# Altium PCB sismin double layer.PcbDoc
Units mil, origin at the board's own origin, x right, y up, seen from the top; angles counter-clockwise.
Board outline 6000 x 4000 mil, 2 copper layers (Top Layer, Bottom Layer); 42 components, 0 nets, 314 pads, 39 vias.
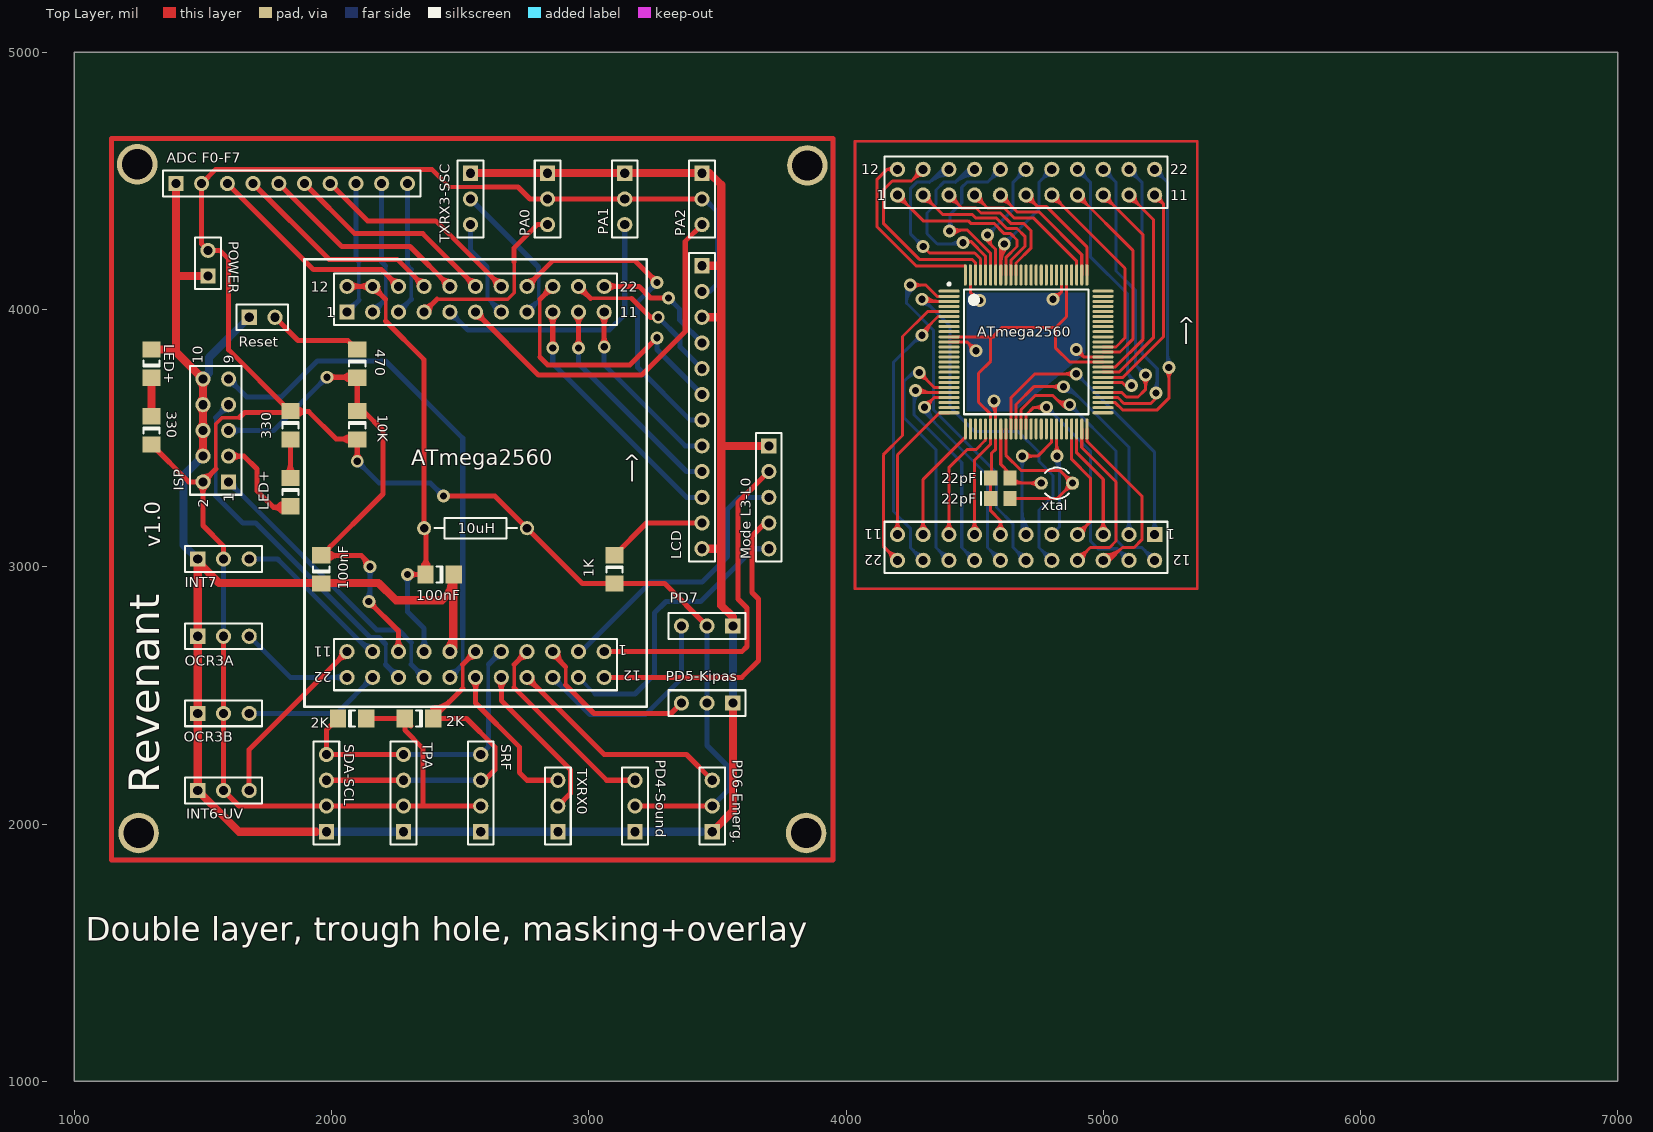
[diagram p0: Top Layer view]
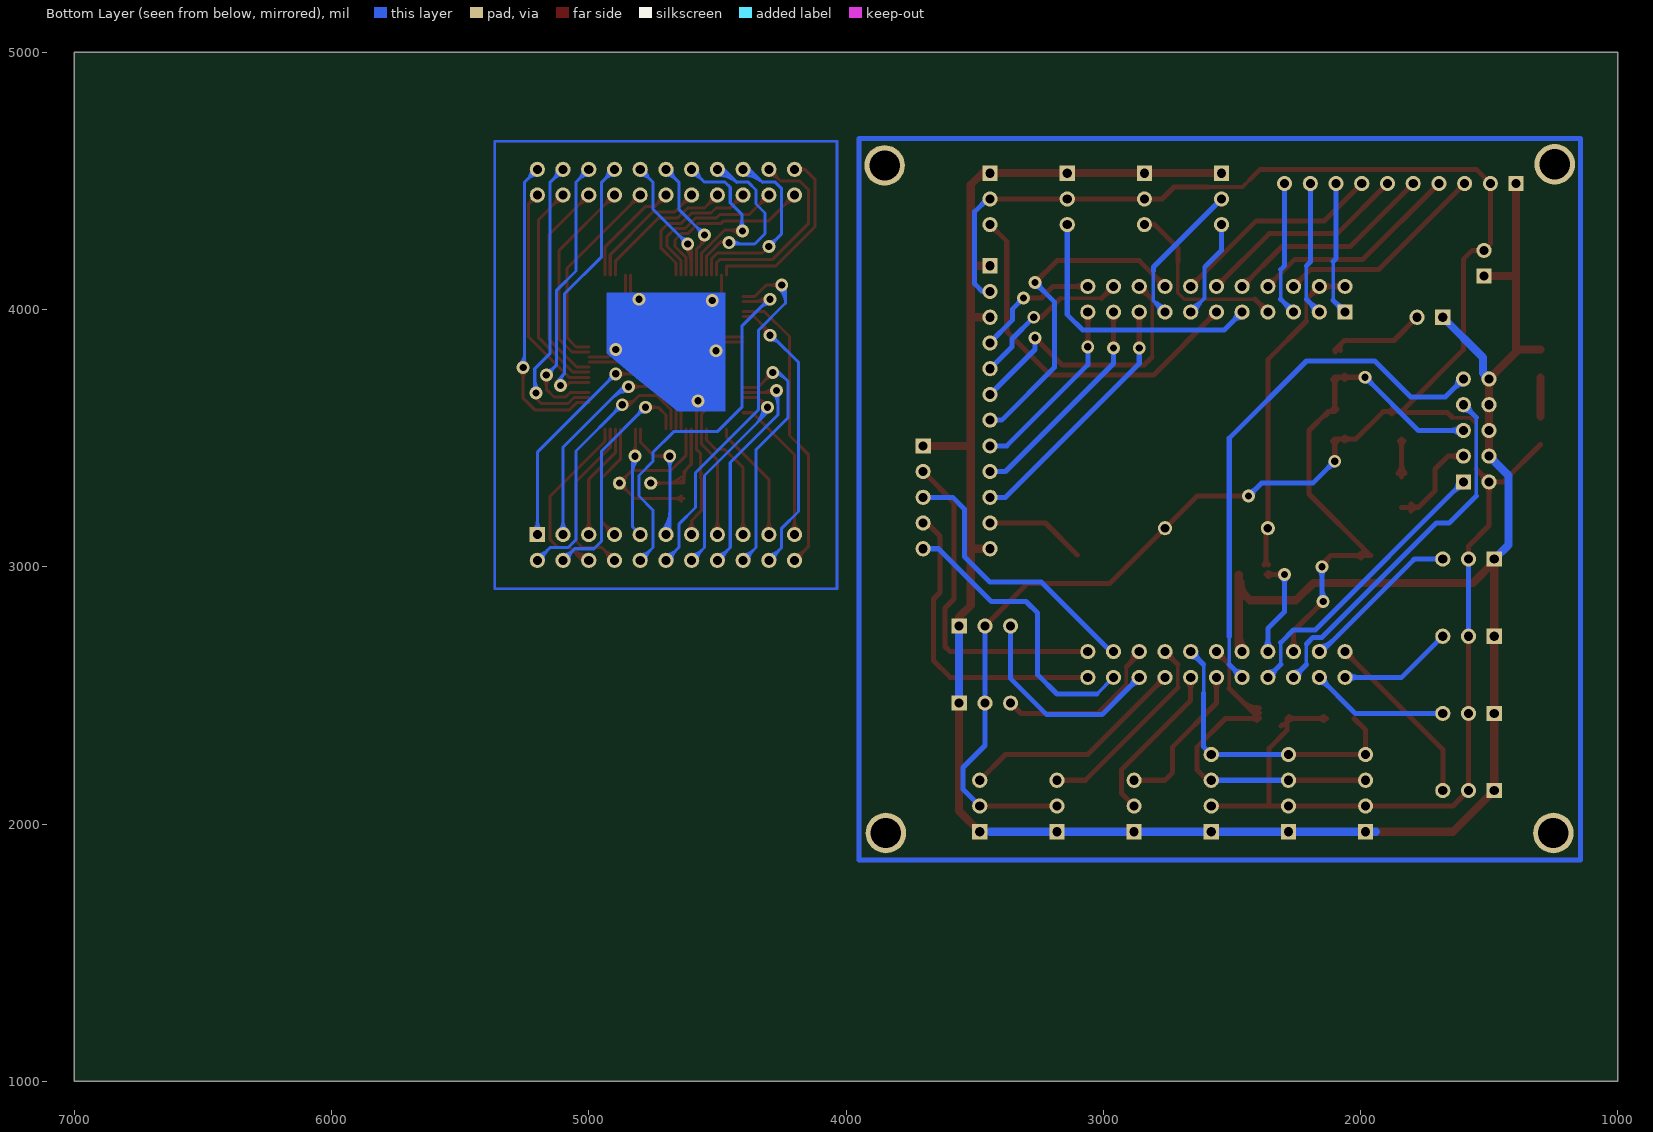
[diagram p1: Bottom Layer view, seen from below]

## Layer stack, top to bottom
Top Layer: signal copper 1.4
Dielectric: dielectric 12.6, FR-4, Dk 4.8
Bottom Layer: signal copper 1.4

## Board outline
1000,1000 7000,1000 7000,5000 1000,5000

## Design rules (kind name [scope] priority, off if disabled: settings)
Clearance [All] p1: gap=10
PolygonConnect [All] p1: connectstyle=Relief reliefconductorwidth=10 reliefentries=4 polygonreliefangle="90 Angle"
RoutingVias [All] p1: holewidth=28 width=50 viastyle="Through Hole" minholewidth=28 minwidth=50 maxholewidth=28 maxwidth=50
SilkscreenOverComponentPads [All] p1: minsilkscreentomaskgap=10
SolderMaskExpansion [All] p1: expansion=4
Width [All] p1: maxlimit=10 minlimit=10 preferedwidth=10
27 further rules are at their usual default settings.

## Components (designator, comment, footprint, x,y, rotation, side; value= is the part's Value field where it differs from the comment)
1K "Res2" 1206 3100,2990 r270 top (schematic designator R.LCD)
2K "Res2" 1206 2080,2410 r0 top (schematic designator R.SDA)
2K "Res2" 1206 2340,2410 r180 top (schematic designator R.SCL)
10K "Res2" 1206 2100,3550 r270 top (schematic designator R.res1)
10uH "10uH" AXIAL-0.4 2560,3150 r0 top (schematic designator L)
22pF "Cap" 0805 4600,3265 r0 top (schematic designator 22pF1)
22pF "" 0805 4600,3345 r0 top
100nF "Cap" 1206 2420,2970 r180 top (schematic designator C)
100nF "Cap" 1206 1960,2990 r90 top (schematic designator C.res)
330 "Res2" 1206 1300,3530 r270 top (schematic designator R.Pow)
330 "Res2" 1206 1840,3550 r270 top (schematic designator R.ISP)
470 "Res2" 1206 2100,3790 r270 top (schematic designator R.res2)
"ADC F0-F7" "Header 10" HDR1X10 1395,4490 r0 top (schematic designator ADC)
ATmega2560 "ATmega2560-16AU" 100A_M 4700,3835 r0 top (schematic designator U1)
Header.A "Header 11X2A" HDR2X11_CEN#1 5200,3125 r180 top
Header.A "Header 11X2A" HDR2X11_CEN#2 3060,2670 r180 top
Header.B "Header 11X2A" HDR2X11_CEN#2 4200,4445 r0 top
Header.B "Header 11X2A" HDR2X11_CEN#1 2060,3990 r0 top
INT6-UV "Header 3" HDR1X3 1480,2130 r0 top (schematic designator UVTron)
INT7 "Header 3" HDR1X3 1480,3030 r0 top
ISP "ISP" HDR2X5 1600,3330 r90 top (schematic designator ISP_S1)
LCD "Header 12" HDR1X12 3440,4170 r270 top
LED+ "LED1" 1206 1300,3790 r90 top (schematic designator Led.Pow)
LED+ "LED1" 1206 1840,3290 r270 top (schematic designator Led.ISP)
"Mode L3-L0" "Header 4" HDR1X5 3700,3470 r270 top (schematic designator DIP.SW)
OCR3A "Header 3" HDR1X3 1480,2730 r0 top
OCR3B "Header 3" HDR1X3 1480,2430 r0 top
PA0 "Header 3" HDR1X3 2840,4530 r270 top
PA1 "Header 3" HDR1X3 3140,4530 r270 top
PA2 "Header 3" HDR1X3 3440,4530 r270 top
PD4-Sound "Header 3" HDR1X3 3180,1970 r90 top (schematic designator Sound)
PD5-Kipas "Header 3" HDR1X3 3560,2470 r180 top (schematic designator Kipas)
PD6-Emerg. "Header 3" HDR1X3 3480,1970 r90 top (schematic designator Emergency)
PD7 "Header 3" HDR1X3 3560,2770 r180 top
POWER "Header 2" HDR1X2 1520,4130 r90 top (schematic designator Switch)
Reset "SW-PB" HDR1X2 1680,3970 r0 top (schematic designator S1)
SDA-SCL "Header 4" HDR1X4 2280,1970 r90 top (schematic designator I2C)
SRF "Header 4" HDR1X4 2580,1970 r90 top
TPA "Header 4" HDR1X4 1980,1970 r90 top
TXRX0 "Header 3" HDR1X3 2880,1970 r90 top (schematic designator USART0)
TXRX3-SSC "Header 3" HDR1X3 2540,4530 r270 top (schematic designator SSC)
xtal "XTAL" BCY-W2/D3.1 4820,3325 r90 top (schematic designator kristal)

## Footprints (in the part's own frame and the unit in brackets; to place one, negate y for a bottom-side part, rotate by r counter-clockwise, add the part's x,y. Pads: shape width x height; smd on the part's side, far side on the other; paste and mask are expansions set on the pad)
100A_M [mm] "Thin QFP, 100-Leads, Body 14x14mm, Pitch 0.5mm, IPC Low Density"
  oval 2.1x0.3 smd: 1(-7.6,6) 2(-7.6,5.5) 3(-7.6,5) 4(-7.6,4.5) 5(-7.6,4) 6(-7.6,3.5) 7(-7.6,3) 8(-7.6,2.5) 9(-7.6,2) 10(-7.6,1.5) 11(-7.6,1) 12(-7.6,0.5) 13(-7.6,0) 14(-7.6,-0.5) 15(-7.6,-1) 16(-7.6,-1.5) 17(-7.6,-2) 18(-7.6,-2.5) 19(-7.6,-3) 20(-7.6,-3.5) 21(-7.6,-4) 22(-7.6,-4.5) 23(-7.6,-5) 24(-7.6,-5.5) 25(-7.6,-6) 51(7.6,-6) 52(7.6,-5.5) 53(7.6,-5) 54(7.6,-4.5) 55(7.6,-4) 56(7.6,-3.5) 57(7.6,-3) 58(7.6,-2.5) 59(7.6,-2) 60(7.6,-1.5) 61(7.6,-1) 62(7.6,-0.5) 63(7.6,0) 64(7.6,0.5) 65(7.6,1) 66(7.6,1.5) 67(7.6,2) 68(7.6,2.5) 69(7.6,3) 70(7.6,3.5) 71(7.6,4) 72(7.6,4.5) 73(7.6,5) 74(7.6,5.5) 75(7.6,6)
  oval 0.3x2.1 smd: 26(-6,-7.6) 27(-5.5,-7.6) 28(-5,-7.6) 29(-4.5,-7.6) 30(-4,-7.6) 31(-3.5,-7.6) 32(-3,-7.6) 33(-2.5,-7.6) 34(-2,-7.6) 35(-1.5,-7.6) 36(-1,-7.6) 37(-0.5,-7.6) 38(0,-7.6) 39(0.5,-7.6) 40(1,-7.6) 41(1.5,-7.6) 42(2,-7.6) 43(2.5,-7.6) 44(3,-7.6) 45(3.5,-7.6) 46(4,-7.6) 47(4.5,-7.6) 48(5,-7.6) 49(5.5,-7.6) 50(6,-7.6) 76(6,7.6) 77(5.5,7.6) 78(5,7.6) 79(4.5,7.6) 80(4,7.6) 81(3.5,7.6) 82(3,7.6) 83(2.5,7.6) 84(2,7.6) 85(1.5,7.6) 86(1,7.6) 87(0.5,7.6) 88(0,7.6) 89(-0.5,7.6) 90(-1,7.6) 91(-1.5,7.6) 92(-2,7.6) 93(-2.5,7.6) 94(-3,7.6) 95(-3.5,7.6) 96(-4,7.6) 97(-4.5,7.6) 98(-5,7.6) 99(-5.5,7.6) 100(-6,7.6)
  silkscreen extent -7.72,-6.15 6.15,6.82, body extent -7,-7 7,7, height 1.2
0805 [mm] "Chip Capacitor; Body 2.0 x 1.2 mm (LxW typ)"
  rect 1.3x1.5 smd: 1(-0.95,0) 2(0.95,0)
  silkscreen extent -1.9,-0.65 -1.9,0.65
1206 [mm] "Chip Capacitor; Body 3.2 x 1.6 mm (LxW typ)"
  rect 1.6x1.8 smd: 1(-1.4,0) 2(1.4,0)
  silkscreen extent -0.3,-0.8 0.3,0.8
AXIAL-0.4 [mm] "Axial Device, Thru-Hole; 2 Leads; 0.4 in Pin Spacing"
  round 1.4 hole 0.85: 1(-5.08,0) 2(5.08,0)
  silkscreen extent -4.06,-1.02 4.06,1.02
BCY-W2/D3.1 [mm] "Crystal, Thru-Hole; 2 Leads; Body 3.1 x 8.2 mm (Dia.xH)"
  round 1.3 hole 0.7: 1(0,1.55) 2(0,-1.55)
  silkscreen extent -1.55,-1.19 1.55,1.17
HDR1X2 [mm] "Connector; Header; 2 Position"
  rect 1.5x1.5 hole 0.9: 1(0,0)
  round 1.5 hole 0.9: 2(2.54,0)
  silkscreen extent -1.27,-1.27 3.81,1.27
HDR1X3 [mm] "Connector; Header; 3 Position"
  rect 1.5x1.5 hole 0.9: 1(0,0)
  round 1.5 hole 0.9: 2(2.54,0) 3(5.08,0)
  silkscreen extent -1.27,-1.27 6.35,1.27
HDR1X4 [mm] "Connector; Header; 4 Position"
  rect 1.5x1.5 hole 0.9: 1(0,0)
  round 1.5 hole 0.9: 2(2.54,0) 3(5.08,0) 4(7.62,0)
  silkscreen extent -1.27,-1.27 8.89,1.27
HDR1X5 [mm] "Connector; Header; 5 Position"
  rect 1.5x1.5 hole 0.9: 1(0,0)
  round 1.5 hole 0.9: 2(2.54,0) 3(5.08,0) 4(7.62,0) 5(10.16,0)
  silkscreen extent -1.27,-1.27 11.43,1.27
HDR1X10 [mm] "Connector; Header; 10 Position"
  rect 1.5x1.5 hole 0.9: 1(0,0)
  round 1.5 hole 0.9: 2(2.54,0) 3(5.08,0) 4(7.62,0) 5(10.16,0) 6(12.7,0) 7(15.24,0) 8(17.78,0) 9(20.32,0) 10(22.86,0)
  silkscreen extent -1.27,-1.27 24.13,1.27
HDR1X12 [mm] "Connector; Header; 12 Position"
  rect 1.5x1.5 hole 0.9: 1(0,0)
  round 1.5 hole 0.9: 2(2.54,0) 3(5.08,0) 4(7.62,0) 5(10.16,0) 6(12.7,0) 7(15.24,0) 8(17.78,0) 9(20.32,0) 10(22.86,0) 11(25.4,0) 12(27.94,0)
  silkscreen extent -1.27,-1.27 29.21,1.27
HDR2X5 [mm] "Connector; Header; 5x2 Position"
  rect 1.5x1.5 hole 0.9: 1(0,0)
  round 1.5 hole 0.9: 2(0,2.54) 3(2.54,0) 4(2.54,2.54) 5(5.08,0) 6(5.08,2.54) 7(7.62,0) 8(7.62,2.54) 9(10.16,0) 10(10.16,2.54)
  silkscreen extent -1.27,-1.27 11.43,3.81
HDR2X11_CEN#1 [mm] "Connector; Header; 11x2 Position"
  rect 1.5x1.5 hole 0.9: 1(0,0)
  round 1.5 hole 0.9: 2(2.54,0) 3(5.08,0) 4(7.62,0) 5(10.16,0) 6(12.7,0) 7(15.24,0) 8(17.78,0) 9(20.32,0) 10(22.86,0) 11(25.4,0) 12(0,2.54) 13(2.54,2.54) 14(5.08,2.54) 15(7.62,2.54) 16(10.16,2.54) 17(12.7,2.54) 18(15.24,2.54) 19(17.78,2.54) 20(20.32,2.54) 21(22.86,2.54) 22(25.4,2.54)
  silkscreen extent -1.27,-1.27 26.67,3.81
HDR2X11_CEN#2 [mm] "Connector; Header; 11x2 Position"
  round 1.5 hole 0.9: 1(0,0) 2(2.54,0) 3(5.08,0) 4(7.62,0) 5(10.16,0) 6(12.7,0) 7(15.24,0) 8(17.78,0) 9(20.32,0) 10(22.86,0) 11(25.4,0) 12(0,2.54) 13(2.54,2.54) 14(5.08,2.54) 15(7.62,2.54) 16(10.16,2.54) 17(12.7,2.54) 18(15.24,2.54) 19(17.78,2.54) 20(20.32,2.54) 21(22.86,2.54) 22(25.4,2.54)
  silkscreen extent -1.27,-1.27 26.67,3.81

## Part data
1K 2K 2K 10K 330 330 470: "Resistor"
10uH: library part INDUCTOR
22pF 100nF 100nF: "Capacitor"
22pF: library part Cap, "Capacitor"
"ADC F0-F7": "Header, 10-Pin"
ATmega2560: "8-bit AVR Microcontroller, 4.5-5.5V, 256KB Flash, 4KB EEPROM, 8KB SRAM, 86 GPIO pins, 100-pin TQFP, Industrial Grade (-40°C to 85°C), Pb-Free"
Header.A Header.A Header.B Header.B: "Header, 11-Pin, Dual row"
INT6-UV INT7 OCR3A OCR3B PA0 PA1 PA2 PD4-Sound PD5-Kipas PD6-Emerg. PD7 TXRX0 TXRX3-SSC: "Header, 3-Pin"
ISP: library part "Header 5X2", "Header, 5-Pin, Dual row"
LCD: "Header, 12-Pin"
LED+ LED+: "Typical RED GaAs LED"
"Mode L3-L0" SDA-SCL SRF TPA: "Header, 4-Pin"
POWER: "Header, 2-Pin"
Reset: "Switch"
xtal: "Crystal Oscillator"

## Free pads (board coordinates)
  round 157.48 hole 118.11: 2(1245,4565) 2(1250,1965) 2(3845,1965) 2(3850,4560)

## Via types
v1: diameter 50, hole 28, Top Layer to Bottom Layer, 39 vias

## Nets (pads, with @x,y where several pads share a name; then routed paths per layer and width w, separated by ;. In a path a pad name is that pad's centre, name@x,y a point inside that pad or via, vN(x,y) a via of type N, cw(c..) or ccw(c..) an arc to the next point about the centre after c; other vN are vias at no path point)
pads on no net: 1K.1 1K.2 2K.1 2K.2 10K.1 10K.2 10uH.1 10uH.2 22pF.1 22pF.2 100nF.1 100nF.2 330.1 330.2 470.1 470.2 "ADC F0-F7.1" "ADC F0-F7.2" "ADC F0-F7.3" "ADC F0-F7.4" "ADC F0-F7.5" "ADC F0-F7.6" "ADC F0-F7.7" "ADC F0-F7.8" "ADC F0-F7.9" "ADC F0-F7.10" "Mode L3-L0.1" "Mode L3-L0.2" "Mode L3-L0.3" "Mode L3-L0.4" "Mode L3-L0.5" ATmega2560.1 ATmega2560.2 ATmega2560.3 ATmega2560.4 ATmega2560.5 ATmega2560.6 ATmega2560.7 ATmega2560.8 ATmega2560.9 ATmega2560.10 ATmega2560.11 ATmega2560.12 ATmega2560.13 ATmega2560.14 ATmega2560.15 ATmega2560.16 ATmega2560.17 ATmega2560.18 ATmega2560.19 ATmega2560.20 ATmega2560.21 ATmega2560.22 ATmega2560.23 ATmega2560.24 ATmega2560.25 ATmega2560.26 ATmega2560.27 ATmega2560.28 ATmega2560.29 ATmega2560.30 ATmega2560.31 ATmega2560.32 ATmega2560.33 ATmega2560.34 ATmega2560.35 ATmega2560.36 ATmega2560.37 ATmega2560.38 ATmega2560.39 ATmega2560.40 ATmega2560.41 ATmega2560.42 ATmega2560.43 ATmega2560.44 ATmega2560.45 ATmega2560.46 ATmega2560.47 ATmega2560.48 ATmega2560.49 ATmega2560.50 ATmega2560.51 ATmega2560.52 ATmega2560.53 ATmega2560.54 ATmega2560.55 ATmega2560.56 ATmega2560.57 ATmega2560.58 ATmega2560.59 ATmega2560.60 ATmega2560.61 ATmega2560.62 ATmega2560.63 ATmega2560.64 ATmega2560.65 ATmega2560.66 ATmega2560.67 ATmega2560.68 ATmega2560.69 ATmega2560.70 ATmega2560.71 ATmega2560.72 ATmega2560.73 ATmega2560.74 ATmega2560.75 ATmega2560.76 ATmega2560.77 ATmega2560.78 ATmega2560.79 ATmega2560.80 ATmega2560.81 ATmega2560.82 ATmega2560.83 ATmega2560.84 ATmega2560.85 ATmega2560.86 ATmega2560.87 ATmega2560.88 ATmega2560.89 ATmega2560.90 ATmega2560.91 ATmega2560.92 ATmega2560.93 ATmega2560.94 ATmega2560.95 ATmega2560.96 ATmega2560.97 ATmega2560.98 ATmega2560.99 ATmega2560.100 Header.A.1 Header.A.2 Header.A.3 Header.A.4 Header.A.5 Header.A.6 Header.A.7 Header.A.8 Header.A.9 Header.A.10 Header.A.11 Header.A.12 Header.A.13 Header.A.14 Header.A.15 Header.A.16 Header.A.17 Header.A.18 Header.A.19 Header.A.20 Header.A.21 Header.A.22 Header.B.1 Header.B.2 Header.B.3 Header.B.4 Header.B.5 Header.B.6 Header.B.7 Header.B.8 Header.B.9 Header.B.10 Header.B.11 Header.B.12 Header.B.13 Header.B.14 Header.B.15 Header.B.16 Header.B.17 Header.B.18 Header.B.19 Header.B.20 Header.B.21 Header.B.22 INT6-UV.1 INT6-UV.2 INT6-UV.3 INT7.1 INT7.2 INT7.3 ISP.1 ISP.2 ISP.3 ISP.4 ISP.5 ISP.6 ISP.7 ISP.8 ISP.9 ISP.10 LCD.1 LCD.2 LCD.3 LCD.4 LCD.5 LCD.6 LCD.7 LCD.8 LCD.9 LCD.10 LCD.11 LCD.12 LED+.1 LED+.2 OCR3A.1 OCR3A.2 OCR3A.3 OCR3B.1 OCR3B.2 OCR3B.3 PA0.1 PA0.2 PA0.3 PA1.1 PA1.2 PA1.3 PA2.1 PA2.2 PA2.3 PD4-Sound.1 PD4-Sound.2 PD4-Sound.3 PD5-Kipas.1 PD5-Kipas.2 PD5-Kipas.3 PD6-Emerg..1 PD6-Emerg..2 PD6-Emerg..3 PD7.1 PD7.2 PD7.3 POWER.1 POWER.2 Reset.1 Reset.2 SDA-SCL.1 SDA-SCL.2 SDA-SCL.3 SDA-SCL.4 SRF.1 SRF.2 SRF.3 SRF.4 TPA.1 TPA.2 TPA.3 TPA.4 TXRX0.1 TXRX0.2 TXRX0.3 TXRX3-SSC.1 TXRX3-SSC.2 TXRX3-SSC.3 xtal.1 xtal.2
copper on no net: | length 113024.8
  Top Layer w11.81: 4177.36,3025 ccw(c4122.71,3025) 4161.35,3063.65 ccw(c4200,3102.29) 4200,3047.64 ; 4180.59,4533.35 ccw(c4160,4520.98) 4160,4545 ; 4180.59,4556.65 cw(c4160,4569.02) 4160,4545 ; 4183.99,3141.01 ccw(c4145.35,3179.65) 4200,3179.65 ccw(c4254.65,3179.65) 4216.01,3141.01 ; 4200,3025 4145,3080 4145,3435 4220,3510 4220,3895 4317.48,3992.48 4400.79,3992.48 ; 4200,3125 4200,3435 4363.78,3598.78 4400.79,3598.78 ; 4200,4422.36 cw(c4200,4367.71) 4238.65,4406.35 cw(c4277.29,4445) 4222.64,4445 ; 4200,4445 4300,4345 4475,4345 4485,4335 4575,4335 4615,4295 4640,4295 4665,4270 4665,4245 4621.26,4201.26 4621.26,4134.21 ; 4200,4545 4160,4545 ; v1@4262.81,4082.19 cw(c4293.72,4051.28) 4293.72,4095 cw(c4293.72,4138.72) v1@4262.81,4107.81 ; v1@4265,4095 4310,4095 4353.46,4051.54 4400.79,4051.54 ; v1(4270,3685) 4277.48,3677.52 4400.79,3677.52 ; v1@4273.06,3688.06 ccw(c4298.51,3713.51) 4298.51,3677.52 ; 4277.36,4545 cw(c4222.71,4545) 4261.35,4506.35 cw(c4300,4467.71) 4300,4522.36 ; v1@4282.81,3672.19 cw(c4295.66,3659.34) 4295.66,3677.52 ; v1@4282.81,3697.81 ccw(c4331.78,3746.78) 4331.78,3677.52 ; 4283.99,3141.01 ccw(c4245.35,3179.65) 4300,3179.65 ccw(c4354.65,3179.65) 4316.01,3141.01 ; v1@4285,3736.89 cw(c4285,3693.17) 4315.92,3724.08 cw(c4346.83,3755) v1@4303.11,3755 ; v1(4285,3755) 4342.8,3697.2 4400.79,3697.2 ; v1@4295,3890 4295,3910 4357.8,3972.8 4400.79,3972.8 ; v1@4295,3918.11 ccw(c4295,3937.69) 4308.85,3923.85 ; v1(4295,4040) 4305,4040 4313.15,4031.85 4400.79,4031.85 ; v1@4298.06,4043.06 ccw(c4325.13,4070.13) 4325.13,4031.85 ; v1@4299.33,3900 cw(c4333.93,3900) 4309.46,3924.46 ; 4300,3125 4300,3340 4463.78,3503.78 4463.78,3535.79 ; v1(4300,4245) 4325,4220 4500,4220 4522.83,4197.17 4522.83,4134.21 ; 4300,4422.36 cw(c4300,4367.71) 4338.65,4406.35 cw(c4377.29,4445) 4322.64,4445 ; 4300,4445 4375,4370 4490,4370 4505,4355 4585,4355 4625,4315 4665,4315 4695,4285 4695,4245 4640.94,4190.94 4640.94,4145 ; 4300,4545 4255,4500 4180,4500 4145,4465 4145,4335 4285,4195 4490,4195 4503.15,4181.85 4503.15,4134.21 ; v1(4305,3620) 4342.83,3657.83 4400.79,3657.83 ; v1@4305,3638.11 ccw(c4305,3681.83) 4335.92,3650.92 ccw(c4366.83,3620) v1@4323.11,3620 ; v1@4307.81,4027.19 cw(c4319.05,4015.95) 4319.05,4031.85 ; v1@4307.81,4052.81 ccw(c4358.4,4103.4) 4358.4,4031.85 ; v1@4313.11,3900 cw(c4380.97,3900) 4332.99,3947.99 ; 4383.99,3141.01 ccw(c4345.35,3179.65) 4400,3179.65 ccw(c4454.65,3179.65) 4416.01,3141.01 ; v1@4395.05,4310 4470,4310 4562.2,4217.8 4562.2,4134.21 ; 4400,3125 4400,3385 4470,3455 4505,3455 4542.52,3492.52 4542.52,3535.79 ; 4400,4422.36 cw(c4400,4367.71) 4438.65,4406.35 cw(c4477.29,4445) 4422.64,4445 ; 4400,4445 4450,4395 4505,4395 4525,4375 4600,4375 4640,4335 4690,4335 4720,4305 4720,4240 4660.63,4180.63 4660.63,4134.21 ; 4400.79,3874.37 4470.63,3874.37 v1(4505,3840) ; 4400.79,3894.06 4575,3894.06 ; v1@4417.81,4292.19 cw(c4460.79,4249.21) 4460.79,4310 ; v1@4417.81,4317.81 ccw(c4436.65,4336.65) 4436.65,4310 ; v1(4455,4260) 4460,4265 4485,4265 ; 4463.78,4134.21 4463.78,4168.78 4273.78,4168.78 4120,4322.56 4120,4505 4160,4545 ; v1@4468.29,4272.3 ccw(c4485,4287.77) 4485,4265 ; v1@4472.51,4255.38 cw(c4485,4252.08) 4485,4265 ; 4483.46,4134.21 4483.46,4066.54 v1@4517.5,4032.5 ; 4483.99,3141.01 ccw(c4445.35,3179.65) 4500,3179.65 ccw(c4554.65,3179.65) 4516.01,3141.01 ; 4485.97,4064.03 ccw(c4513.3,4091.36) v1@4517.86,4052.98 ; v1@4486.89,3840 ccw(c4443.17,3840) 4474.08,3870.92 ccw(c4505,3901.83) v1@4505,3858.11 ; 4492.62,4057.38 cw(c4470.24,4035) v1@4501.89,4035 ; 4500,3125 4500,3415 4562.2,3477.2 4562.2,3535.79 4562.2,3592.8 4515,3640 4515,3752.15 4562.2,3799.35 4562.2,3887.2 4605,3930 4815,3930 ; 4500,4422.36 cw(c4500,4367.71) 4538.65,4406.35 cw(c4577.29,4445) 4522.64,4445 ; 4500,4445 4550,4395 4615,4395 4655,4355 4730,4355 4896.85,4188.15 4896.85,4134.21 ; 4538.66,3488.66 ccw(c4526.97,3500.35) 4543.5,3500.35 ; 4542.52,4134.21 4542.52,4207.48 4485,4265 ; v1@4545,4280 4545,4270 4581.89,4233.11 4581.89,4134.21 ; v1@4553.68,4287.71 ccw(c4574.19,4274.96) 4557.11,4257.89 ; 4560.03,3361.35 ccw(c4548.04,3373.34) 4565,3373.34 ; v1@4562.19,3632.19 cw(c4514.64,3584.64) 4581.89,3584.64 ; 4562.6,3345 4562.6,3265 4562.6,3217.4 4600,3180 4600,3125 ; 4565,3345 4565,3440 4581.89,3456.89 4581.89,3535.79 4581.89,3621.89 v1@4581.89,3631.89 ; v1@4565.38,4280.44 ccw(c4589.33,4265.55) 4569.39,4245.61 ; v1@4571.94,3641.94 cw(c4547.91,3617.91) 4581.89,3617.91 cw(c4602.09,3617.91) v1@4587.81,3632.19 ; 4583.99,3141.01 ccw(c4545.35,3179.65) 4600,3179.65 ccw(c4654.65,3179.65) 4616.01,3141.01 ; 4600,4422.36 cw(c4600,4367.71) 4638.65,4406.35 cw(c4677.29,4445) 4622.64,4445 ; 4600,4445 4665,4380 4750,4380 4916.54,4213.46 4916.54,4134.21 ; 4601.57,3535.79 4601.57,3398.43 4630,3370 4630,3325 4758.98,3325 ; 4601.57,4134.21 4601.57,4236.57 v1@4610,4245 ; 4601.57,4178.87 cw(c4691.13,4178.87) v1@4627.81,4242.19 ; 4601.57,4212.13 cw(c4657.87,4212.13) v1@4618.06,4251.94 ; 4614.69,3385.31 cw(c4581.22,3351.84) 4628.54,3350.92 ; 4621.26,3535.79 4621.26,3433.74 4680,3375 4831.02,3375 4881.02,3325 4821.02,3265 4629.53,3265 ; 4630.22,3339.79 ccw(c4665.93,3375.5) 4665.93,3325 ; 4639.97,3254.56 cw(c4665.17,3229.36) 4665.17,3265 cw(c4665.17,3300.64) 4639.97,3275.44 ; 4639.97,3349.53 ccw(c4699.2,3408.76) 4699.2,3325 ; 4640.94,3535.79 4640.94,3655.94 4735,3750 v1(4895,3750) ; 4640.94,4134.21 4640.94,4145 ; 4640.94,4172.92 4640.94,4145 ; 4660.63,3535.79 4660.63,3630.63 4730,3700 v1(4845,3700) ; 4680.31,3535.79 4680.31,3610.32 4735,3665 4805,3665 4840,3630 ; v1(4685,3430) v1@4695,3430 ; v1@4697.81,3417.19 cw(c4728.72,3386.28) 4728.72,3430 cw(c4728.72,3473.72) v1@4697.81,3442.81 ; 4700,3535.79 4700,3590 4730,3620 v1(4780,3620) ; 4700,4422.36 cw(c4700,4367.71) 4738.65,4406.35 cw(c4777.29,4445) 4722.64,4445 ; 4700,4445 4745,4400 4780,4400 4936.22,4243.78 4936.22,4134.21 ; v1@4705,3440 v1@4695,3430 ; 4745.75,3311.78 ccw(c4713.83,3279.85) 4713.83,3325 ccw(c4713.83,3370.15) 4745.75,3338.22 ; v1@4767.19,3607.19 ccw(c4736.28,3576.28) 4736.28,3620 ccw(c4736.28,3663.72) v1@4767.19,3632.81 ; 4798.43,3535.79 4798.43,3483.43 4745,3430 v1@4695,3430 ; 4800,4422.36 cw(c4800,4367.71) 4838.65,4406.35 cw(c4877.29,4445) 4822.64,4445 ; 4800,4445 5085,4160 5085,3890 5049.69,3854.68 4999.21,3854.68 ; v1@4805,4030 v1@4810,4025 ; v1@4807.19,3442.81 ccw(c4780.84,3469.16) 4818.11,3469.16 ; v1@4807.71,4057.91 ccw(c4812.97,4092.62) 4837.79,4067.79 ; 4818.11,3478.28 ccw(c4868.28,3478.28) v1@4832.81,3442.81 ; 4818.11,3535.79 4818.11,3446.89 4825,3440 4815,3430 v1(4820,3430) ; 4820,3650 ccw(c4843.12,3673.12) v1@4860.42,3645.37 ; v1@4820,4050 4837.8,4067.8 ; v1@4823.11,4040 cw(c4854.76,4040) 4832.38,4062.38 ; v1@4832.19,3687.19 ccw(c4801.28,3656.28) 4801.28,3700 ccw(c4801.28,3743.72) v1@4832.19,3712.81 ; 4832.27,3637.73 ccw(c4852.54,3658.01) v1@4867.71,3633.68 ; 4837.8,4134.21 4837.8,4067.8 ; 4844.53,3625.47 ccw(c4861.96,3642.9) v1@4875,3621.98 ; v1@4853.97,3621.56 ccw(c4840,3614.21) 4840,3630 ; v1@4853.97,3638.44 cw(c4840,3645.79) 4840,3630 ; 4857.48,4134.21 4857.48,3972.48 4815,3930 ; v1(4870,3630) 4840,3630 ; 4877.17,3535.79 4877.17,3417.83 4950,3345 4950,3175 4900,3125 ; 4881.02,3306.3 ccw(c4881.02,3261.15) 4849.1,3293.08 ccw(c4817.18,3325) 4862.32,3325 ccw(c4817.18,3325) 4849.1,3356.92 ccw(c4881.02,3388.85) 4881.02,3343.7 ; v1@4882.19,3737.19 ccw(c4851.28,3706.28) 4851.28,3750 ccw(c4851.28,3793.72) v1@4882.19,3762.81 ; v1(4895,3845) 4924.69,3815.32 ; v1@4895.53,3826.9 cw(c4896.68,3787.32) 4924.68,3815.32 ; 4896.85,3535.79 4896.85,3443.15 5000,3340 5000,3125 ; 4900,3025 4950,3075 5025,3075 5050,3100 5050,3330 4916.54,3463.46 4916.54,3535.79 ; 4900,3047.64 ccw(c4900,3102.29) 4938.65,3063.65 ccw(c4977.29,3025) 4922.64,3025 ; 4900,3147.64 ccw(c4900,3202.29) 4938.65,3163.65 ccw(c4977.29,3125) 4922.64,3125 ; 4900,4422.36 cw(c4900,4367.71) 4938.65,4406.35 cw(c4977.29,4445) 4922.64,4445 ; 4900,4445 5115,4230 5115,3885 5065,3835 4999.21,3835 ; v1@4913.1,3844.47 ccw(c4952.68,3843.32) 4924.68,3815.32 ; 4935.24,3500.35 ccw(c4960.8,3500.35) 4942.72,3482.27 ; 4936.22,3535.79 4936.22,3488.78 5150,3275 5150,3105 5120,3075 5075,3075 ; 4983.99,3141.01 ccw(c4945.35,3179.65) 5000,3179.65 ccw(c5054.65,3179.65) 5016.01,3141.01 ; 4999.21,3638.15 5046.85,3638.15 5075,3610 5210,3610 5255,3655 v1(5255,3775) ; 4999.21,3657.83 5057.17,3657.83 5080,3635 5185,3635 5205,3655 v1(5205,3675) ; 4999.21,3677.52 5072.48,3677.52 5090,3660 5135,3660 5160.86,3685.86 5165,3690 v1(5165,3745) ; 4999.21,3716.89 5073.11,3716.89 5095,3695 v1@5115,3695 ; 4999.21,3736.57 5076.57,3736.57 5235,3895 5235,4410 ; 4999.21,3756.26 5061.26,3756.26 5195,3890 5195,4350 5100,4445 ; 4999.21,3775.94 5045.94,3775.94 5155,3885 5155,4290 5000,4445 ; 4999.21,3795.63 4869.37,3795.63 4815,3850 4815,3930 ; 4999.21,3815.32 4924.69,3815.32 ; 4999.65,3020.09 ccw(c5002.61,3061.94) 5032.28,3032.28 ; 5000,3025 5025,3025 5075,3075 ; 5000,4422.36 cw(c5000,4367.71) 5038.65,4406.35 cw(c5077.29,4445) 5022.64,4445 ; 5000.62,3033.84 ccw(c5005.43,3101.85) 5053.64,3053.64 ; 5001.59,3047.58 ccw(c5008.24,3141.75) 5075,3075 ; 5100,4422.36 cw(c5100,4367.71) 5138.65,4406.35 cw(c5177.29,4445) 5122.64,4445 ; v1@5152.19,3732.19 cw(c5121.28,3701.28) 5165,3701.28 cw(c5208.72,3701.28) v1@5177.81,3732.19 ; 5200,4445 5235,4410 ; 5201.64,4422.42 cw(c5204.74,4379.74) 5235,4410 ; 5222.58,4443.36 ccw(c5265.26,4440.26) 5235,4410 ; v1@5242.19,3762.19 cw(c5211.28,3731.28) 5255,3731.28 cw(c5298.72,3731.28) v1@5267.81,3762.19
  Top Layer w13.78: 1550,3380 1550,3555 1575,3580 1642.5,3580 ; 2210,3955 2210,4040 ; 2410,4040 2685,4040 2710,4065 2710,4185 ; 2430,4505 2458.58,4476.42 2593.58,4476.42 ; 2510,2526.85 2510,2620 ; 2710,2530 2710,2620 ; 2810,3815 2810,4040 ; 2910,2540 2910,2610 ; 3006.42,4043.58 3166.42,4043.58
  Top Layer w19.68: 1300,3474.88 1444.88,3330 1500,3330 ; 1486.08,3316.08 cw(c1452.48,3282.48) 1500,3282.48 cw(c1547.52,3282.48) 1513.92,3316.08 ; 1500,3349.68 ccw(c1500,3397.21) 1533.6,3363.6 ccw(c1567.21,3330) 1519.69,3330 ; 1550,3380 1500,3330 ; 1566.08,2736.08 cw(c1532.48,2702.48) 1580,2702.48 cw(c1627.52,2702.48) 1593.92,2736.08 ; 1580,2130 1640,2070 1980,2070 2280,2070 2580,2070 ; 1580,2155 1580,2730 ; 1580,3030 1580,3080 1500,3160 1500,3330 ; 1595,4490 1930,4155 2195,4155 2260,4090 ; 1600,3430 1660,3430 1710,3380 1710,3295 1774.06,3230.94 ; 1613.92,3416.08 cw(c1647.52,3382.48) 1647.52,3430 cw(c1647.52,3477.52) 1613.92,3443.92 ; 1642.5,3580 1662.5,3600 1840,3600 ; 1680,2130 1680,2290 2060,2670 ; 1695,4490 1990,4195 2255,4195 2360,4090 ; 1780,3970 1870,3880 2063.15,3880 2100,3843.15 ; 1795,4490 2040,4245 2305,4245 2460,4090 ; 1803.73,3217.75 ccw(c1774.06,3190.96) 1774.06,3230.94 ; 1803.73,3244.14 cw(c1774.06,3270.93) 1774.06,3230.94 ; 1826.08,3362.97 ccw(c1792.48,3396.58) 1840,3396.58 ccw(c1887.52,3396.58) 1853.92,3362.97 ; 1831.65,3488.5 cw(c1811.49,3468.34) 1840,3468.34 cw(c1868.51,3468.34) 1848.35,3488.5 ; 1836.64,3606.51 cw(c1833.28,3603.15) 1838.03,3603.15 ; 1840,3230.94 1774.06,3230.94 ; 1840,3349.06 1840,3496.85 ; 1840,3603.15 1911.85,3603.15 2018.15,3496.85 2100,3496.85 v1(2100,3410) ; 1840,3605.12 1838.03,3605.12 1600,3843.15 1600,4195 1565,4230 1520,4230 1495,4255 1495,4490 1550,4545 2390,4545 2430,4505 ; 1877.88,3594.8 cw(c1898.04,3574.64) 1898.04,3603.15 cw(c1898.04,3631.66) 1877.88,3611.5 ; 1895,4490 2090,4295 2355,4295 2560,4090 ; 1961.97,3043.15 cw(c1966.72,3043.15) 1963.36,3046.51 ; 1980,2170 2280,2170 ; 1981.65,3043.15 cw(c2033.93,3043.15) 1996.96,3080.11 ; v1(1981.85,3736.85) 2100,3736.85 2100,3603.15 2126.85,3603.15 2200,3530 2200,3283.15 1960,3043.15 2116.85,3043.15 v1@2145,3015 ; v1@1992.57,3726.13 cw(c2018.44,3700.26) 2018.44,3736.85 cw(c2018.44,3773.44) v1@1992.57,3747.57 ; 1995,4490 2140,4345 2405,4345 2660,4090 ; 1997.88,3034.8 cw(c2018.04,3014.64) 2018.04,3043.15 cw(c2018.04,3071.66) 1997.88,3051.5 ; 2024.88,2410 1980,2365.12 1980,2270 2280,2270 ; 2040.31,2670 cw(c1992.79,2670) 2026.4,2636.4 cw(c2060,2602.79) 2060,2650.32 ; 2060,4090 2160,4090 2210,4040 ; 2062.12,3488.5 ccw(c2041.96,3468.34) 2041.96,3496.85 ccw(c2041.96,3525.36) 2062.12,3505.2 ; 2062.12,3728.5 ccw(c2041.96,3708.34) 2041.96,3736.85 ccw(c2041.96,3765.36) 2062.12,3745.2 ; 2070.58,3872.57 cw(c2048.73,3850.72) 2077.91,3840.56 ; 2073.92,4076.08 cw(c2107.52,4042.48) 2107.52,4090 cw(c2107.52,4137.52) 2073.92,4103.92 ; v1@2089.28,3420.72 ccw(c2063.41,3446.59) 2100,3446.59 ccw(c2136.59,3446.59) v1@2110.72,3420.72 ; 2091.65,3488.5 cw(c2071.49,3468.34) 2100,3468.34 cw(c2128.51,3468.34) 2108.35,3488.5 ; 2091.65,3611.5 ccw(c2071.49,3631.66) 2100,3631.66 ccw(c2128.51,3631.66) 2108.35,3611.5 ; 2091.65,3728.5 cw(c2071.49,3708.34) 2100,3708.34 cw(c2128.51,3708.34) 2108.35,3728.5 ; 2092.77,3850.38 cw(c2081.64,3839.26) 2096.5,3834.09 ; 2117.05,3042.95 cw(c2074.11,3000) v1@2134.84,3000 ; 2129.53,3591.34 cw(c2129.53,3569.29) 2145.12,3584.88 ; 2133.15,2410 2280,2410 ; 2141.5,2401.65 cw(c2161.66,2381.49) 2161.66,2410 cw(c2161.66,2438.51) 2141.5,2418.35 ; v1@2145,2849.84 cw(c2145,2813.25) 2170.88,2839.12 cw(c2196.75,2865) v1@2160.16,2865 ; v1(2145,2865) 2260,2750 2260,2670 ; 2146.08,4076.08 ccw(c2112.48,4042.48) 2112.48,4090 ccw(c2112.48,4137.52) 2146.08,4103.92 ; 2160,4070.32 cw(c2160,4022.79) 2193.6,4056.4 cw(c2227.21,4090) 2179.68,4090 ; 2210,3955 2358.47,3806.53 2360,3805 2360,3150 2366.85,3143.15 2366.85,3028.04 ; 2240.32,4090 ccw(c2192.79,4090) 2226.4,4123.6 ccw(c2260,4157.21) 2260,4109.69 ; 2246.08,2683.92 ccw(c2212.48,2717.52) 2260,2717.52 ccw(c2307.52,2717.52) 2273.92,2683.92 ; 2278.5,2401.65 ccw(c2258.34,2381.49) 2258.34,2410 ccw(c2258.34,2438.51) 2278.5,2418.35 ; 2282.25,2407.65 cw(c2282.28,2407.48) 2282.4,2407.6 ; 2284.88,2410 2284.88,2365.12 2355,2295 2355,2070 ; 2285.54,2388.24 cw(c2290.09,2361.35) 2309.37,2380.63 ; v1(2295,2970) 2366.85,2970 ; v1@2305.72,2959.28 cw(c2331.59,2933.41) 2331.59,2970 cw(c2331.59,3006.59) v1@2305.72,2980.72 ; 2340.32,4090 ccw(c2292.79,4090) 2326.4,4123.6 ccw(c2360,4157.21) 2360,4109.69 ; 2358.5,2961.65 ccw(c2338.34,2941.49) 2338.34,2970 ccw(c2338.34,2998.51) 2358.5,2978.35 ; 2358.5,3007.88 ccw(c2338.34,3028.04) 2366.85,3028.04 ; 2360,3990 2410,4040 ; 2360,4009.68 ccw(c2360,4057.21) 2393.6,4023.6 ccw(c2427.21,3990) 2379.68,3990 ; 2375.2,3007.88 cw(c2395.36,3028.04) 2366.85,3028.04 ; 2393.15,2411.97 ccw(c2393.15,2416.72) 2396.51,2413.36 ; 2393.15,2431.65 ccw(c2393.15,2483.93) 2430.11,2446.96 ; 2393.15,2451.34 ccw(c2393.15,2551.14) 2463.72,2480.57 ; 2401.5,2401.65 cw(c2421.66,2381.49) 2421.66,2410 cw(c2421.66,2438.51) 2401.5,2418.35 ; v1(2435,3275) 2635,3275 2760,3150 2975.12,2934.88 3100,2934.88 3295.12,2934.88 3460,2770 ; 2440.32,4090 ccw(c2392.79,4090) 2426.4,4123.6 ccw(c2460,4157.21) 2460,4109.69 ; 2510,2526.85 2393.15,2410 2525,2410 2635,2300 2635,2210 2595,2170 ; 2510,2620 2560,2670 ; 2540.32,2670 cw(c2492.79,2670) 2526.4,2636.4 cw(c2560,2602.79) 2560,2650.32 ; 2540.32,4090 ccw(c2492.79,4090) 2526.4,4123.6 ccw(c2560,4157.21) 2560,4109.69 ; 2546.08,2556.08 cw(c2512.48,2522.48) 2560,2522.48 cw(c2607.52,2522.48) 2573.92,2556.08 ; 2560,2570 2560,2470 2730,2300 2730,2200 2760,2170 2880,2170 ; 2560,3970.32 cw(c2560,3922.79) 2593.6,3956.4 cw(c2627.21,3990) 2579.68,3990 ; 2560,3990 2805,3745 3205,3745 3375,3915 3375,4265 3440,4330 ; 2593.58,4476.42 2725,4476.42 2771.42,4430 2840,4430 3140,4430 3440,4430 ; 2640.32,4090 ccw(c2592.79,4090) 2626.4,4123.6 ccw(c2660,4157.21) 2660,4109.69 ; 2646.08,2556.08 cw(c2612.48,2522.48) 2660,2522.48 cw(c2707.52,2522.48) 2673.92,2556.08 ; 2660,2570 2660,2480 2929.37,2210.63 2929.37,2119.37 2880,2070 ; 2710,2530 3070,2170 3180,2170 ; 2710,2620 2760,2670 ; 2710,4185 2710,4240 2800,4330 2840,4330 ; 2740.32,2670 cw(c2692.79,2670) 2726.4,2636.4 cw(c2760,2602.79) 2760,2650.32 ; 2760,2550.32 cw(c2760,2502.79) 2793.6,2536.4 ; 2760,4090 2860,4190 3180,4190 v1(3265,4105) ; 2760,4109.69 ccw(c2760,4157.21) 2793.6,4123.6 ccw(c2827.21,4090) 2779.68,4090 ; 2779.68,2570 ccw(c2827.21,2570) 2793.6,2536.4 ; 2810,3815 2840,3785 3160,3785 v1(3265,3890) ; 2810,4040 2860,4090 ; 2840.32,4090 cw(c2792.79,4090) 2826.4,4056.4 cw(c2860,4022.79) 2860,4070.32 ; 2846.08,3976.08 cw(c2812.48,3942.48) 2860,3942.48 cw(c2907.52,3942.48) 2873.92,3976.08 ; v1@2849.28,3860.72 ccw(c2823.41,3886.59) 2860,3886.59 ccw(c2896.59,3886.59) v1@2870.72,3860.72 ; 2860,2650.32 cw(c2860,2626.93) 2876.53,2643.47 ; 2860,2670 2860,2660 2910,2610 ; v1@2860,3860 2860,3990 ; 2879.68,2670 ccw(c2951.35,2670) 2900.68,2619.32 ; 2910,2540 3020,2430 3320,2430 3360,2470 ; 2946.08,3976.08 cw(c2912.48,3942.48) 2960,3942.48 cw(c3007.52,3942.48) 2973.92,3976.08 ; v1@2949.28,3860.72 ccw(c2923.41,3886.59) 2960,3886.59 ccw(c2996.59,3886.59) v1@2970.72,3860.72 ; v1(2960,3850) v1@2960,3870 ; v1@2960,3865 v1@2960,3870 ; 2960,3875 v1@2960,3870 ; 2960,3990 v1@2960,3870 ; 2960,4070.32 cw(c2960,4022.79) 2993.6,4056.4 cw(c3027.21,4090) 2979.68,4090 ; 2960,4090 3006.42,4043.58 ; 3046.08,3976.08 cw(c3012.48,3942.48) 3060,3942.48 cw(c3107.52,3942.48) 3073.92,3976.08 ; v1@3049.28,3865.72 ccw(c3023.41,3891.59) 3060,3891.59 ccw(c3096.59,3891.59) v1@3070.72,3865.72 ; 3060,2570 3595,2570 3660,2635 3660,2875 3635,2900 3635,3120 3685,3170 3700,3170 ; 3060,2670 3595,2670 3615,2690 3615,2840 3580,2875 3580,3250 3700,3370 ; v1(3060,3855) 3060,3990 ; 3060,4090 3195,4090 3240,4045 v1(3310,4045) v1@3320,4045 ; 3073.92,4076.08 cw(c3107.52,4042.48) 3107.52,4090 cw(c3107.52,4137.52) 3073.92,4103.92 ; 3100,3045.12 3224.88,3170 3440,3170 ; 3166.42,4043.58 3240,3970 v1(3270,3970) ; 3180,2070 3480,2070 ; v1@3249.84,4105 ccw(c3213.25,4105) 3239.12,4130.88 ccw(c3265,4156.75) v1@3265,4120.16 ; v1@3309.28,4034.28 ccw(c3283.41,4008.41) 3283.41,4045 ccw(c3283.41,4081.59) v1@3309.28,4055.72 ; 3480,2170 3380,2270 3060,2270 2793.6,2536.4
  Top Layer w31.5: 1300,3585.12 1300,3734.88 ; 1300,3845.12 1384.88,3845.12 1395,3835 ; 1395,4490 1395,4130 ; 1480,3030 1480,3020 ; 1490.26,3439.74 ccw(c1466.73,3463.27) 1500,3463.27 ccw(c1533.27,3463.27) 1509.74,3439.74 ; 1490.26,3520.26 cw(c1466.73,3496.73) 1500,3496.73 cw(c1533.27,3496.73) 1509.74,3520.26 ; 1490.26,3539.74 ccw(c1466.73,3563.27) 1500,3563.27 ccw(c1533.27,3563.27) 1509.74,3539.74 ; 1490.26,3620.26 cw(c1466.73,3596.73) 1500,3596.73 cw(c1533.27,3596.73) 1509.74,3620.26 ; 1490.26,3639.74 ccw(c1466.73,3663.27) 1500,3663.27 ccw(c1533.27,3663.27) 1509.74,3639.74 ; 1490.26,3720.26 cw(c1466.73,3696.73) 1500,3696.73 cw(c1533.27,3696.73) 1509.74,3720.26 ; 1500,3430 1500,3530 1500,3630 1500,3730 1395,3835 ; 1520,4130 1395,4130 ; 1940,1970 1640,1970 1480,2130 1480,2430 1480,2730 1480,3020 ; 2443.75,2883.75 ccw(c2387.02,2940.47) 2467.24,2940.47 ; 2450.26,2679.74 ccw(c2394.99,2735.01) 2473.15,2735.01 ; 2460,2670 2473.15,2683.15 2473.15,2913.15 ; 2473.15,2970 2473.15,2913.15 ; 2540,4530 2840,4530 3140,4530 3440,4530 3470,4530 3515,4485 3515,4175 ; 3440,3070 3510,3070 3515,3065 ; 3440,3970 3515,3970 ; 3440,4170 3510,4170 3515,4175 ; 3480,1970 3560,2050 3560,2470 ; 3560,2770 3560,2805 3515,2850 3515,3065 ; 3700,3470 3515,3470 ; 1395,3835 1395,4130 ; 1480,3020 1563.15,2936.85 2183.15,2936.85 2250,2870 2430,2870 2473.15,2913.15 ; 3515,3065 3515,3470 ; 3515,3470 3515,3970 ; 3515,3970 3515,4175
  Bottom Layer w11.81: 4235,4023.41 cw(c4310.83,4023.41) v1@4261.73,4081.2 ; 4235,4053.21 cw(c4285.51,4053.21) v1@4252.8,4091.7 ; 4235.6,3730.6 cw(c4284.06,3682.15) v1@4284.94,3750.67 ; v1(4250,4095) 4235,4080 4235,4025 4340,3920 4340,3610 4585,3365 4585,3230 4650,3165 4650,3075 4700,3025 ; 4255.55,3865.55 cw(c4295,3826.1) v1@4295,3881.89 ; v1@4257.19,3672.19 cw(c4238.35,3653.35) 4265,3653.35 ; 4258.7,3753.7 cw(c4284.65,3727.76) v1@4285.12,3764.45 ; 4265,3629.21 cw(c4325.79,3629.21) v1@4282.81,3672.19 ; v1@4265,3665 4265,3590 4450,3405 4450,3075 4500,3025 ; 4267.62,3877.62 ccw(c4245.24,3900) v1@4276.89,3900 ; v1@4275,3755 4260,3755 4225,3720 4225,3580 4350,3455 4350,3075 4400,3025 ; 4277.36,3025 ccw(c4222.71,3025) 4261.35,3063.65 ccw(c4300,3102.29) 4300,3047.64 ; v1@4281.89,4245 ccw(c4238.17,4245) 4269.08,4275.92 ccw(c4300,4306.83) v1@4300,4263.11 ; v1@4285,3885 4275,3885 4185,3795 4185,3215 4250,3150 4250,3075 4300,3025 ; v1@4292.5,4047.5 4405,3935 4405,3620 4500,3525 4670,3525 4750,3445 4750,3410 4805,3355 4805,3275 4750,3220 4750,3075 4800,3025 ; v1@4295,4021.89 cw(c4295,3966.1) 4334.45,4005.55 ; v1(4300,4245) 4250,4295 4250,4470 4275,4495 4325,4495 4375,4545 4400,4545 ; v1@4305,3635 v1(4305,3620) 4305,3600 4550,3355 4550,3075 4600,3025 ; v1@4309.33,3620 ccw(c4368.07,3620) 4326.54,3578.46 ; v1@4313.11,4040 ccw(c4344.76,4040) 4322.38,4017.62 ; v1@4323.11,3620 ccw(c4415.12,3620) 4350.06,3554.94 ; 4325.23,4494.74 cw(c4400,4407.35) 4400,4522.36 ; 4342.2,4512.2 cw(c4400,4454.4) 4400,4536.14 ; 4365.72,4535.72 cw(c4400,4501.45) 4400,4549.92 ; 4377.36,3025 ccw(c4322.71,3025) 4361.35,3063.65 ccw(c4400,3102.29) 4400,3047.64 ; v1@4390,4305 4405,4305 4405,4370 4450,4415 4450,4475 4470,4495 4550,4495 4600,4545 ; v1@4392.19,4317.81 ccw(c4361.28,4348.72) 4405,4348.72 ccw(c4448.72,4348.72) v1@4417.81,4317.81 ; 4399.21,4255 ccw(c4399.21,4315.79) v1@4442.19,4272.81 ; 4423.35,4255 cw(c4423.35,4228.35) v1@4442.19,4247.19 ; 4425.23,4494.74 cw(c4500,4407.35) 4500,4522.36 ; 4442.2,4512.2 cw(c4500,4454.4) 4500,4536.14 ; v1(4455,4260) 4460,4265 4445,4265 4435,4255 4355,4255 4315,4295 4315,4375 4350,4410 4350,4465 4380,4495 4425,4495 4475,4545 4500,4545 ; 4465.72,4535.72 cw(c4500,4501.45) 4500,4549.92 ; 4477.36,3025 ccw(c4422.71,3025) 4461.35,3063.65 ccw(c4500,3102.29) 4500,3047.64 ; v1@4492.19,3827.19 cw(c4461.28,3796.28) 4505,3796.28 cw(c4548.72,3796.28) v1@4517.81,3827.19 ; v1@4505,3855.28 v1(4505,3840) 4505,3730 4600,3635 4625,3635 ; 4520,4010 4520,4030 4815,4030 4895,3950 v1(4895,3845) 4895,3830 4795,3830 4625,3660 4625,3635 ; v1@4532.81,4022.19 cw(c4551.65,4003.35) 4551.65,4030 ; v1@4532.81,4047.81 ccw(c4575.79,4090.79) 4575.79,4030 ; 4533.48,3701.52 cw(c4476.95,3645) v1@4556.89,3645 ; v1(4550,4290) 4650,4390 4650,4495 4700,4545 ; v1@4550,4308.11 ccw(c4550,4351.83) 4580.92,4320.92 ccw(c4611.83,4290) v1@4568.11,4290 ; 4557,3678 cw(c4524,3645) v1@4570.67,3645 ; 4577.36,3025 ccw(c4522.71,3025) 4561.35,3063.65 ccw(c4600,3102.29) 4600,3047.64 ; 4577.36,4545 cw(c4522.71,4545) 4561.35,4506.35 cw(c4600,4467.71) 4600,4522.36 ; v1@4578.7,3647.25 ccw(c4600.49,3660.5) 4600.49,3635 ; v1@4590.47,3654.41 ccw(c4625,3675.41) 4625,3635 ; v1(4615,4255) 4750,4390 4750,4495 4800,4545 ; v1@4615,4273.11 ccw(c4615,4316.83) 4645.92,4285.92 ccw(c4676.83,4255) v1@4633.11,4255 ; v1@4672.19,3417.19 cw(c4641.28,3386.28) 4685,3386.28 cw(c4728.72,3386.28) v1@4697.81,3417.19 ; 4677.36,3025 ccw(c4622.71,3025) 4661.35,3063.65 ccw(c4700,3102.29) 4700,3047.64 ; 4677.36,4545 cw(c4622.71,4545) 4661.35,4506.35 cw(c4700,4467.71) 4700,4522.36 ; 4685,3182.6 ccw(c4757.6,3182.6) 4706.26,3131.26 ; 4685,3215.87 ccw(c4790.87,3215.87) 4716.01,3141.01 ; v1(4685,3430) 4685,3140 4700,3125 4710,3135 ; 4737.14,4030 ccw(c4737.14,4107.86) v1@4792.19,4052.81 ; 4770.4,4030 ccw(c4770.4,4074.6) v1@4801.94,4043.06 ; 4777.36,3025 ccw(c4722.71,3025) 4761.35,3063.65 ccw(c4800,3102.29) 4800,3047.64 ; 4777.36,4545 cw(c4722.71,4545) 4761.35,4506.35 cw(c4800,4467.71) 4800,4522.36 ; v1@4780,3601.89 cw(c4780,3558.17) 4810.92,3589.08 cw(c4841.83,3620) v1@4798.11,3620 ; v1(4780,3620) 4950,3450 4950,3100 4980,3070 5055,3070 5100,3025 ; 4800,3125 4830,3155 4830,3410 v1@4820,3420 ; v1@4805,4021.89 cw(c4805,3978.17) 4835.92,4009.08 cw(c4866.83,4040) v1@4823.11,4040 ; v1@4807.19,3417.19 cw(c4752.14,3362.14) 4830,3362.14 ; 4815.06,3830 ccw(c4815.06,3924.94) 4882.19,3857.81 ccw(c4851.28,3888.72) 4895,3888.72 ccw(c4938.72,3888.72) v1@4907.81,3857.81 ; v1@4816.94,3426.94 cw(c4785.4,3395.4) 4830,3395.4 ; v1@4845,3681.89 cw(c4845,3589.88) 4910.06,3654.94 ; v1@4845,3695.67 cw(c4845,3636.93) 4886.54,3678.46 ; v1(4845,3700) 4865,3700 5100,3465 5100,3125 ; 4848.33,3830 ccw(c4848.33,3891.67) v1@4891.94,3848.06 ; v1@4870,3611.89 cw(c4870,3568.17) 4900.92,3599.08 cw(c4931.83,3630) v1@4888.11,3630 ; v1(4870,3630) 5050,3450 5050,3105 5080,3075 5150,3075 5200,3025 ; v1@4895,3731.89 cw(c4895,3688.17) 4925.92,3719.08 cw(c4956.83,3750) v1@4913.11,3750 ; v1(4895,3750) 5200,3445 5200,3125 ; 4900,4522.36 cw(c4900,4467.71) 4938.65,4506.35 cw(c4977.29,4545) 4922.64,4545 ; 4900,4545 4950,4495 4950,4205 5095,4060 5095,3750 5115,3730 v1@5115,3700 ; 5000,4522.36 cw(c5000,4467.71) 5038.65,4506.35 cw(c5077.29,4545) 5022.64,4545 ; 5000,4545 5050,4495 5050,4150 5125,4075 5125,3785 v1(5165,3745) ; 5077.36,3025 ccw(c5022.71,3025) 5061.35,3063.65 ccw(c5100,3102.29) 5100,3047.64 ; 5083.99,3141.01 ccw(c5045.35,3179.65) 5100,3179.65 ccw(c5154.65,3179.65) 5116.01,3141.01 ; 5095.77,3749.23 cw(c5066.15,3719.61) v1@5105.89,3706.37 ; 5100,4522.36 cw(c5100,4467.71) 5138.65,4506.35 cw(c5177.29,4545) 5122.64,4545 ; 5100,4545 5150,4495 5150,3830 5210,3770 v1@5210,3675 ; 5111.54,3733.46 cw(c5089.8,3711.73) v1@5118.96,3702.01 ; v1@5146.89,3745 ccw(c5103.17,3745) 5134.08,3775.92 ccw(c5165,3806.83) v1@5165,3763.11 ; 5177.36,3025 ccw(c5122.71,3025) 5161.35,3063.65 ccw(c5200,3102.29) 5200,3047.64 ; 5183.99,3141.01 ccw(c5145.35,3179.65) 5200,3179.65 ccw(c5254.65,3179.65) 5216.01,3141.01 ; v1@5192.19,3687.81 ccw(c5149.21,3730.79) 5210,3730.79 ; 5200,4522.36 cw(c5200,4467.71) 5238.65,4506.35 cw(c5277.29,4545) 5222.64,4545 ; 5200,4545 5250,4495 5250,3785 v1@5260,3775 ; 5210,3706.65 ccw(c5236.65,3706.65) v1@5217.81,3687.81 ; v1@5242.19,3787.81 ccw(c5223.35,3806.65) 5250,3806.65 ; 5250,3830.79 ccw(c5310.79,3830.79) v1@5267.81,3787.81
  Bottom Layer w13.78: 1550,3275 1550,3580 ; 2106.42,4036.42 2106.42,4186.42 ; 2210,2620 2210,2700 ; 2210,4040 2210,4170 ; 2310,2620 2310,2705 ; 2310,4040 2310,4155 ; 2510,2620 2510,2730 ; 2605,4165 2606.42,4163.58 2606.42,4043.58 2626.4,4023.6 ; 2610,2510 2610,2620 ; 2793.6,4023.6 2806.42,4036.42 2806.42,4148.58 2805,4150 ; 2960,2570 3025,2505
  Bottom Layer w19.68: 1550,3275 1655,3170 1705,3170 2150,2725 2185,2725 2210,2700 ; 1550,3580 1600,3630 ; 1580,2730 1580,3030 ; 1580.31,3630 cw(c1532.79,3630) 1566.4,3596.4 cw(c1600,3562.79) 1600,3610.32 ; 1600,3310.32 cw(c1600,3262.79) 1633.6,3296.4 cw(c1667.21,3330) 1619.69,3330 ; 1600,3330 2175,2755 2260,2755 2310,2705 ; 1600,3530 1775,3530 v1(1981.85,3736.85) ; 1600,3710.32 cw(c1600,3662.79) 1633.6,3696.4 cw(c1667.21,3730) 1619.69,3730 ; 1600,3730 1670,3660 1805,3660 1945,3800 2210,3800 2510,3500 2510,2730 ; 1613.92,3516.08 cw(c1647.52,3482.48) 1647.52,3530 cw(c1647.52,3577.52) 1613.92,3543.92 ; 1680,2430 2020,2430 2160,2570 ; 1680,2730 1840,2570 2060,2570 ; 1680,3030 1790,3030 1792.78,3027.22 2150,2670 2160,2670 ; v1@1966.69,3736.85 cw(c1930.1,3736.85) 1955.97,3710.97 cw(c1981.85,3685.1) v1@1981.85,3721.69 ; 2046.08,2556.08 ccw(c2012.48,2522.48) 2012.48,2570 ccw(c2012.48,2617.52) 2046.08,2583.92 ; 2060,3990 2106.42,4036.42 ; 2060,4009.68 ccw(c2060,4057.21) 2093.6,4023.6 ccw(c2127.21,3990) 2079.68,3990 ; 2095,4490 2095,4197.83 2106.42,4186.42 ; v1@2100,3394.84 cw(c2100,3358.25) 2125.88,3384.12 cw(c2151.75,3410) v1@2115.16,3410 ; v1(2100,3410) 2185,3325 2385,3325 v1(2435,3275) ; 2109.32,2710.68 ccw(c2160,2761.35) 2160,2689.68 ; 2133.47,2686.53 cw(c2116.93,2670) 2140.32,2670 ; v1@2134.28,2875.72 ccw(c2096.34,2913.66) 2150,2913.66 ; v1@2139.28,2989.28 cw(c2113.41,2963.41) 2150,2963.41 cw(c2186.59,2963.41) v1@2160.72,2989.28 ; 2140.32,2570 cw(c2092.79,2570) 2126.4,2536.4 cw(c2160,2502.79) 2160,2550.32 ; v1(2145,2865) 2150,2870 v1(2150,3000) ; 2150,2889.52 ccw(c2169.52,2889.52) v1@2155.72,2875.72 ; 2160,3990 2210,4040 ; 2160,4009.68 ccw(c2160,4057.21) 2193.6,4023.6 ccw(c2227.21,3990) 2179.68,3990 ; 2195,4490 2195,4185 2210,4170 ; 2210,2620 2260,2570 ; 2240.32,2570 ccw(c2192.79,2570) 2226.4,2603.6 ccw(c2260,2637.21) 2260,2589.68 ; 2260,3990 2310,4040 ; 2260,4009.68 ccw(c2260,4057.21) 2293.6,4023.6 ccw(c2327.21,3990) 2279.68,3990 ; 2280,2170 2580,2170 ; 2280,2270 2580,2270 2610,2300 2610,2510 ; v1@2284.28,2959.28 cw(c2258.41,2933.41) 2295,2933.41 cw(c2331.59,2933.41) v1@2305.72,2959.28 ; v1(2295,2970) 2295,2825 2360,2760 2360,2670 ; 2295,4490 2295,4170 2310,4155 ; 2310,2620 2360,2570 ; 2340.32,2570 ccw(c2292.79,2570) 2326.4,2603.6 ccw(c2360,2637.21) 2360,2589.68 ; 2346.08,2683.92 ccw(c2312.48,2717.52) 2360,2717.52 ccw(c2407.52,2717.52) 2373.92,2683.92 ; v1@2419.84,3275 ccw(c2383.25,3275) 2409.12,3300.88 ccw(c2435,3326.75) v1@2435,3290.16 ; 2460,2570 2510,2620 ; 2460,2589.68 ccw(c2460,2637.21) 2493.6,2603.6 ccw(c2527.21,2570) 2479.68,2570 ; 2460,3970.32 cw(c2460,3922.79) 2493.6,3956.4 cw(c2527.21,3990) 2479.68,3990 ; 2460,3990 2530,3920 3080,3920 3140,3980 3140,4330 ; 2540,4330 2540,4230 2605,4165 ; 2540,4430 2805,4165 2805,4150 ; 2610,2620 2660,2670 ; 2640.32,2670 cw(c2592.79,2670) 2626.4,2636.4 cw(c2660,2602.79) 2660,2650.32 ; 2640.32,3990 ccw(c2592.79,3990) 2626.4,4023.6 ccw(c2660,4057.21) 2660,4009.68 ; 2760,4009.68 ccw(c2760,4057.21) 2793.6,4023.6 ccw(c2827.21,3990) 2779.68,3990 ; 2860,2550.32 cw(c2860,2502.79) 2893.6,2536.4 ; v1(2860,3850) 2860,3790 3380,3270 3440,3270 ; 2879.68,2570 ccw(c2927.21,2570) 2893.6,2536.4 ; 2960,2670 2970,2670 3240,2940 3440,2940 3540,3040 3540,3225 3585,3270 3700,3270 ; v1(2960,3850) 2960,3790 3380,3370 3440,3370 ; 3025,2505 3180,2505 3255,2580 3255,2820 3300,2865 3435,2865 3640,3070 3700,3070 ; 3060,3830 v1(3060,3855) ; v1@3060,3870 v1(3060,3855) ; v1@3249.84,4105 cw(c3213.25,4105) 3239.12,4079.12 cw(c3265,4053.25) v1@3265,4089.84 ; v1(3265,3890) 3265,3845 3440,3670 ; v1(3265,4105) 3190,4030 3190,3775 3395,3570 3440,3570 ; v1(3270,3970) 3355,3885 3355,3855 3440,3770 ; v1(3310,4045) 3353.42,4001.58 3353.42,3958.56 3440,3871.98 3440,3870 ; 3360,2770 3360,2565 3220,2425 3005,2425 2893.6,2536.4 ; 3440,3470 3375,3470 3060,3785 v1(3060,3855) ; 3440,4070 3470,4070 3500,4100 3500,4380 3450,4430 3440,4430 ; 3460,2770 3460,2470 3460,2305 3545,2220 3545,2135 3480,2070
  Bottom Layer w31.5: 1480,3030 1425,3085 1425,3355 1500,3430 ; 1500,3743.78 ccw(c1500,3777.05) 1523.52,3753.52 ; 1513.78,3730 cw(c1547.05,3730) 1523.52,3753.52 ; 1680,3970 1523.52,3813.52 1523.52,3753.52 ; 1940,1970 2240,1970 2540,1970 2840,1970 3140,1970 3440,1970 ; 3560,2470 3560,2770
  other v1: 4575,3645 5110,3705 4295,3900 4520,4035 4805,4040 4402.52,4305

## Other copper
Bottom Layer:
  region: 4470,4065 4930,4065 4930,3830 4805,3725 4655,3605 4470,3605
Multi-Layer:
  lines w10: 4035,2915 5365,2915 5365,4655 4035,4655 4035,2915
  lines w19.68: 1145,1860 3950,1860 3950,4665 1145,4665 1145,1860

## Silkscreen, mask and mechanical layers (free items; w line width, h text height)
Top Overlay:
  lines w10: 1895,2455 3225,2455 3225,4195 1895,4195 1895,2455
  text "^" at 5290,3910 h60
  text "|" at 5310,3885 h60
  text "ATmega2560" at 2310,3395 h60
  text "^" at 3135,3375 h60
  text "|" at 3155,3350 h60
  text "v1.0" at 1335,3075 h60 r90
  text "Revenant" at 1330,2120 h118.11 r90
  text "Double layer, trough hole, masking+overlay" at 1045,1515 h157.48

## Text inside footprints (layer, text, board x,y; h text height)
Header.A: Top Overlay "22" at 4140,3045 h39.37 r180; Top Overlay "11" at 4140,3145 h39.37 r180; Top Overlay "12" at 5340,3045 h39.37 r180; Top Overlay "1" at 5280,3145 h39.37 r180
Header.A: Top Overlay "1" at 3150,2695 h39.37 r180; Top Overlay "12" at 3205,2595 h39.37 r180; Top Overlay "11" at 2000,2690 h39.37 r180; Top Overlay "22" at 2000,2590 h39.37 r180
Header.B: Top Overlay "22" at 5260,4525 h39.37; Top Overlay "11" at 5260,4425 h39.37; Top Overlay "12" at 4060,4525 h39.37; Top Overlay "1" at 4120,4425 h39.37
Header.B: Top Overlay "22" at 3120,4070 h39.37; Top Overlay "11" at 3120,3970 h39.37; Top Overlay "12" at 1920,4070 h39.37; Top Overlay "1" at 1980,3970 h39.37
ISP: Top Overlay "2" at 1520,3230 h39.37 r90; Top Overlay "1" at 1620,3250 h39.37 r90; Top Overlay "9" at 1620,3790 h39.37 r90; Top Overlay "10" at 1500,3790 h39.37 r90